# EAGLE board POCKET-BIVERT_MGB-001 (EAGLE 9.0.1)
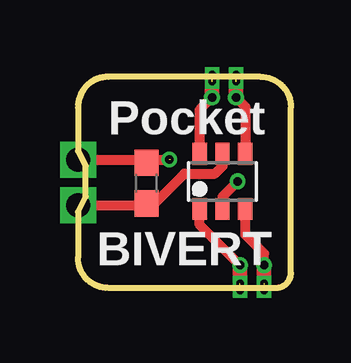
[diagram p0: board, top side]
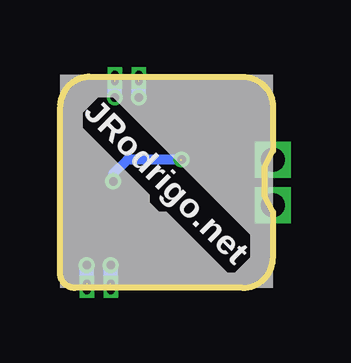
[diagram p1: board, bottom side, seen from below]

Size 8.89 x 8.8 mm. Coordinates in mm from the lower left corner, seen from the top.
Outline: 1.27,0 8.26,0 arc90 8.89,0.64 8.89,7.53 arc90 7.62,8.8 1.27,8.8 arc90 0,7.53 0,5.71 0.33,5.08 0.33,3.81 0,3.17 0,1.27 arc90 1.27,0
Copper layers (1*16): Top 0.035559375mm / dielectric 1.6mm / Bottom 0.035559375mm
Design rules "oshpark-2layer *": minimum track width 6mil, minimum drill 10mil, track to track 6mil, track to pad 6mil, pad to pad 6mil, via to via 6mil, smd to smd 6mil, copper to edge 15mil, drill to drill 6mil, minimum pad ring 5mil, minimum via ring 1mil, stop-mask expansion 2.5mil, vias tented up to drill 15mil, thermal gap 10mil

## Footprints (pad centres in the part's own frame; a part is rotated, then mirrored left to right if it is on the bottom)
C0603 = smd 1.1 x 1: 1 -0.85,0; 2 0.85,0
SOT23-6 = smd 0.6 x 0.9: 1 -0.95,-1.15; 2 0,-1.15; 3 0.95,-1.15; 4 0.95,1.15; 5 0,1.15; 6 -0.95,1.15

## Placement (x,y rotation side)
C  100nF  [C0603]  2.86,4.37 90 top
INV  SN74LVC2G04  [SOT23-6]  6.03,4.45 0 top

## Library data of the parts
C = rcl
INV = linear

## Tracks (layer width: path | path; a pad name or v marks a point on that pad's centre or on a via)
GND  (via drill 0.35 pad 0.66, 1 pad 1.3)  (1 unrouted)
  Top 0.406: v0,5.35 3.85,5.35 | v6.67,4.45 6.03,3.81 6.03,3.17
  Bottom 0.406: v3.81,5.35 6.08,5.35 6.67,4.76 v6.67,4.45
IN1  (via drill 0.3 pad 0.61)  (1 unrouted)
  Top 0.406: v6.77,0.1 v6.77,-0.1 v6.77,0 | 6.77,0.95 5.08,2.64 5.08,3.17
  Top 0.61: v6.77,0 6.77,0.95
  other vias: 6.77,0.2
IN2  (via drill 0.3 pad 0.61)  (3 unrouted)
  Top 0.406: 6.99,3.17 6.99,2.22 7.77,1.44 7.77,0.95
  Top 0.61: v7.77,0 7.77,0.95
  other vias: 7.77,-0.1 7.77,0.2 7.77,0.1
OUT1  (via drill 0.3 pad 0.61)  (4 unrouted)
  Top 0.406: 5.6,7.94 5.08,7.42 5.08,5.71
  Top 0.61: v5.6,8.89 5.6,7.94
  other vias: 5.6,8.8 5.6,8.7 5.6,8.6
OUT2  (via drill 0.3 pad 0.61)  (4 unrouted)
  Top 0.406: 6.6,7.94 6.99,7.55 6.99,5.71
  Top 0.61: v6.6,8.89 6.6,7.94
  other vias: 6.6,8.8 6.6,8.7 6.6,8.6
S$1  (via drill 0.35 pad 0.66)
  other vias: 6.77,0.95 5.6,7.94 6.6,7.94
S$2  (via drill 0.35 pad 0.66)
  other vias: 7.77,0.95
S$3
  Bottom 0.61: 5.6,7.94 5.6,8.89
S$4
  Bottom 0.61: 6.6,7.94 6.6,8.89
S$5
  Bottom 0.61: 6.77,0.95 6.77,0
S$6
  Bottom 0.61: 7.77,0.95 7.77,0
VCC  (via drill 1 pad 1.3)
  Top 0.406: v0,3.45 3.13,3.45 4.45,4.76 5.71,4.76 6.03,5.08 6.03,5.71

## Text on the board
tPlace: Pocket | BIVERT
bPlace: JRodrigo.net